# Altium PCB CurrentSens.PcbDoc
Units mil, origin at the board's own origin, x right, y up, seen from the top; angles counter-clockwise.
Board outline 2425 x 1984 mil, 2 copper layers (Top Layer, Bottom Layer); 37 components, 22 nets, 90 pads, 18 vias.
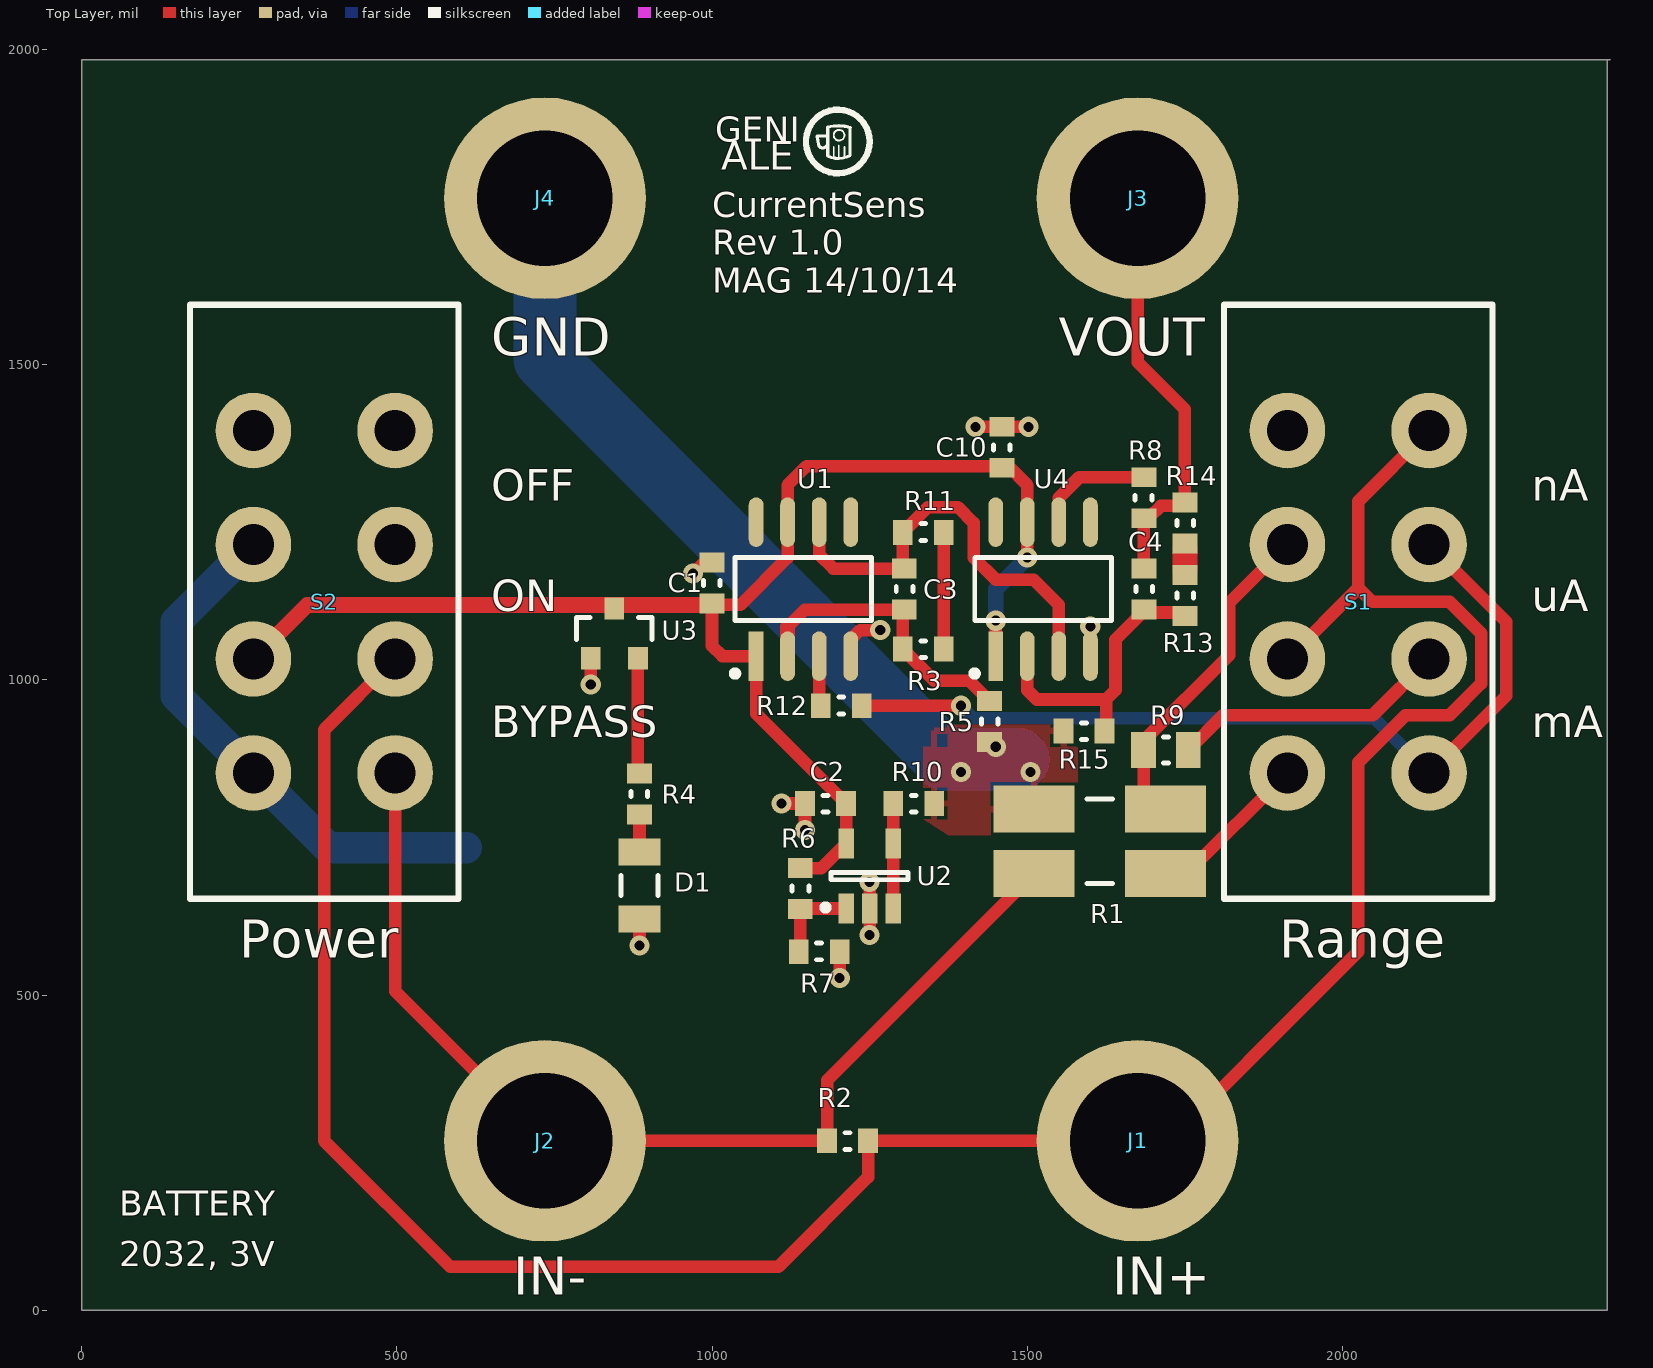
[diagram p0: Top Layer view]
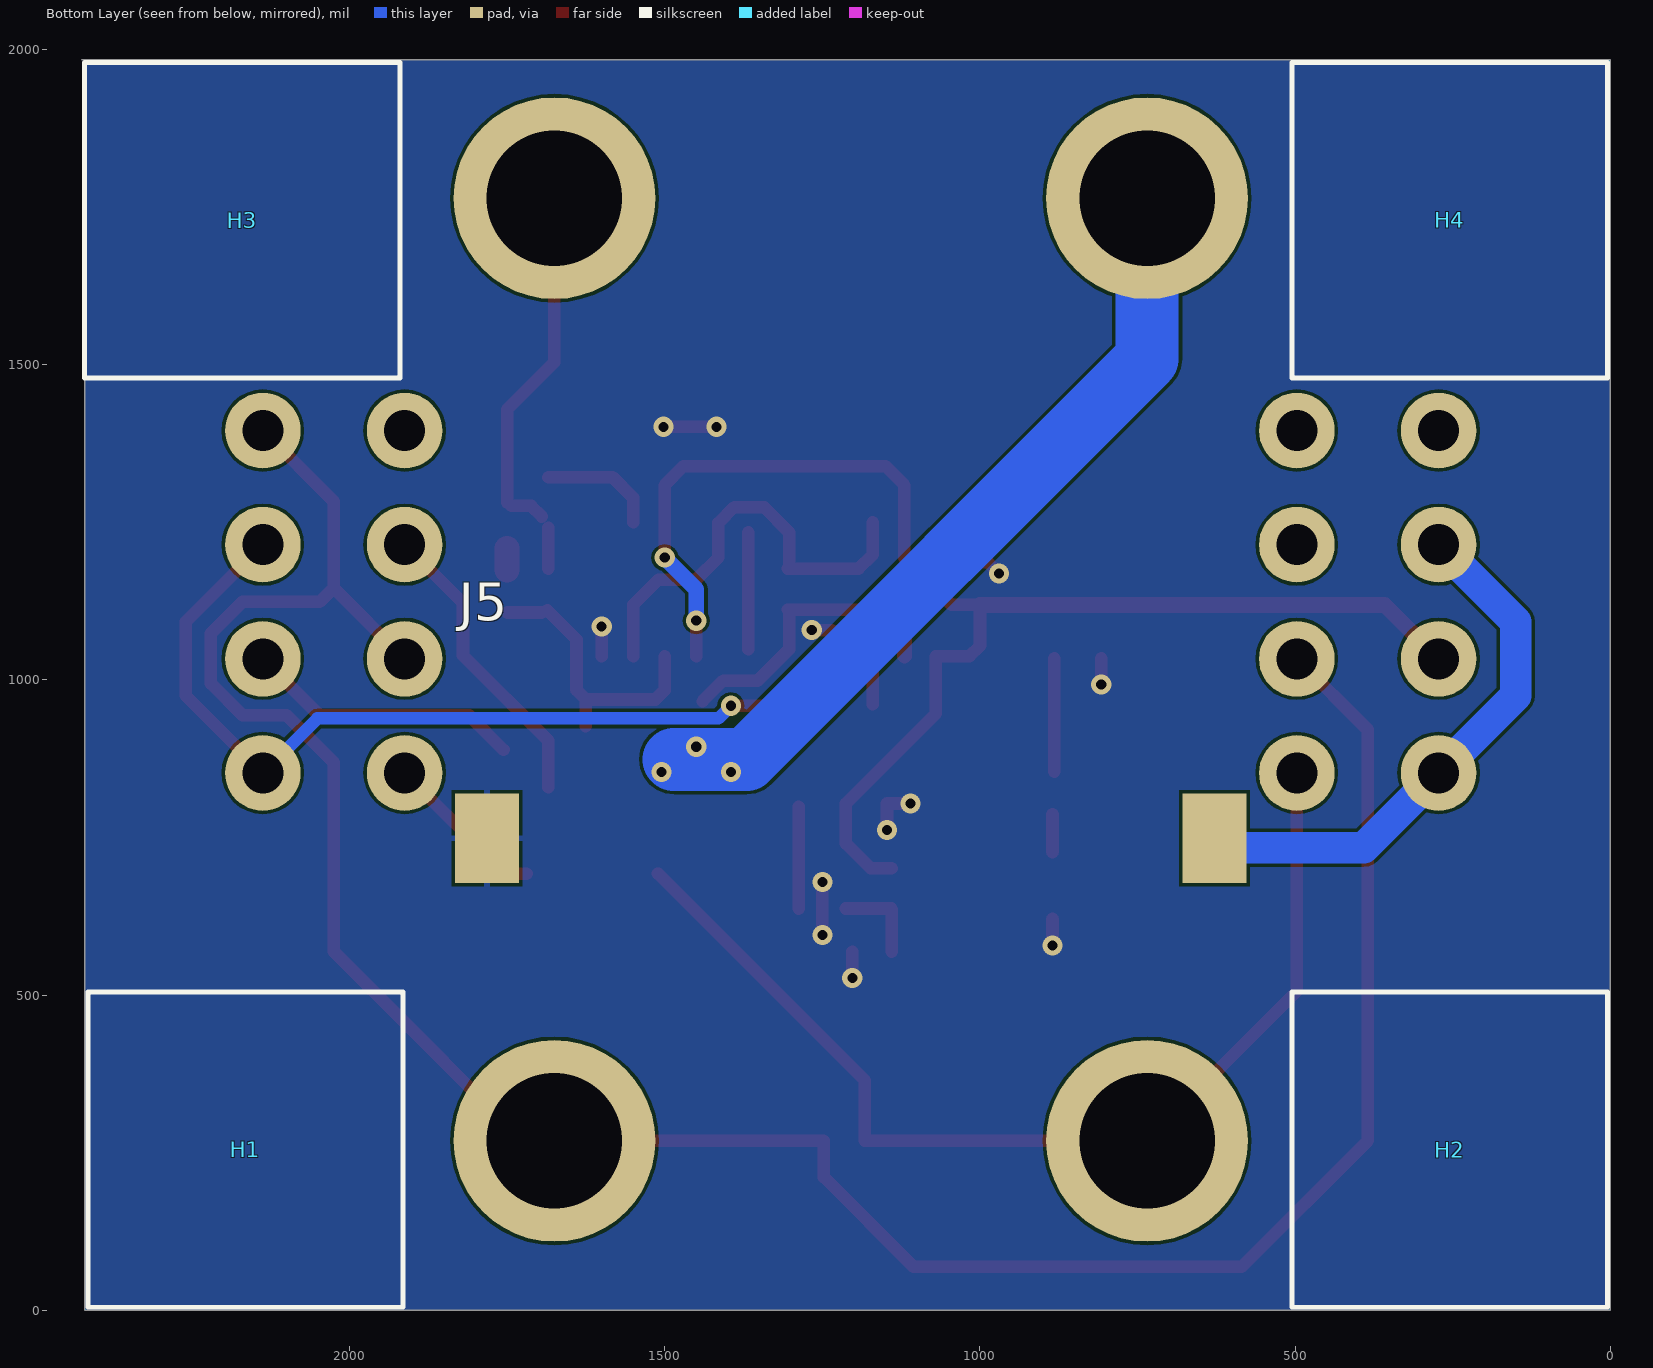
[diagram p1: Bottom Layer view, seen from below]

## Layer stack, top to bottom
Top Layer: signal copper 1.4
Dielectric: dielectric 12.6, FR-4, Dk 4.8
Bottom Layer: signal copper 1.4

## Board outline
0,0 0,1984 2425,1984 2420,1984 2420,0

## Design rules (kind name [scope] priority, off if disabled: settings)
Clearance Clearance~MyroPCBStandard [All] p1: gap=5 // Sunstone Circuits Minimum Clearance Rule (MLB~4&6 Layer Designs)
Height [All] p1: minheight=0 maxheight=600 prefheight=78.74
HoleSize HoleSize~MyroPCBStandard [All] p1: absolutevalues=TRUE maxlimit=251 minlimit=15.75 maxpercent=80.000 minpercent=20.000 // Sunstone Circuits Hole Size Rule (MLB~4&6 Layer Designs)
HoleSize Testpoint [All] p2: absolutevalues=TRUE maxlimit=100 minlimit=1 maxpercent=80.000 minpercent=20.000
HoleSize TestPointUsage [All] p3: absolutevalues=TRUE maxlimit=100 minlimit=1 maxpercent=80.000 minpercent=20.000
MinimumAnnularRing "MinimumAnnularRing~Sunstone Circuits" [All] p1: minimumring=5 // Sunstone Circuits Minimum Annular Ring (MLB~4&6 Layer Designs)
MinimumSolderMaskSliver [All] p1: minsoldermaskwidth=1
PlaneClearance "PlaneClearance~Sunstone Circuits" [All] p1: clearance=12 // Sunstone Circuits Power Plane Clearance Rule (MLB~4&6 Layer Designs)
PlaneConnect [isvia] p1: planeconnectstyle=Direct reliefexpansion=20 reliefentries=4 reliefconductorwidth=10 reliefairgap=10
PlaneConnect "PlaneConnect~Sunstone Circuits" [All] p2: planeconnectstyle=Relief reliefexpansion=20 reliefentries=4 reliefconductorwidth=10 reliefairgap=10 // Sunstone Circuits Power Plane Connect Rule (MLB~4&6 Layer Designs)
PolygonConnect PolygonConnect_Via [All vs IsVia or InComponent('U1') or InComponent('L2') or InComponent('C7')] p1: connectstyle=Direct reliefconductorwidth=10 reliefentries=4 polygonreliefangle="90 Angle"
PolygonConnect "PolygonConnect~Sunstone Circuits" [All] p2: connectstyle=Relief reliefconductorwidth=10 reliefentries=4 polygonreliefangle="90 Angle" // Sunstone Circuits Polygon Connect Style (MLB~4&6 Layer Designs)
RoutingVias RoutingVias~MyroPCBStandard [All] p1: holewidth=16 width=20 viastyle="Through Hole" minholewidth=15.75 minwidth=20 maxholewidth=20 maxwidth=40 // Sunstone Circuits Routing Vias Rule (MLB~4&6 Layer Designs)
ShortCircuit ShortCircuit~MyroPCBStandard [All] p1: allowed=FALSE // Sunstone Circuits Short Circuit Rule~Do Not Allow (MLB~4&6 Layer Designs)
SilkToSilkClearance SilkToSilkClearanceOK [IsText] p1: silktosilkclearance=0
SilkToSilkClearance [All] p2: silktosilkclearance=6
SilkscreenOverComponentPads SilkToSolderMaskClearance_Exception [InComponent('R8') or InComponent('BT1') or InComponent('BT2')] p1: minsilkscreentomaskgap=0
SilkscreenOverComponentPads SilkToSolderMaskClearance [IsPad] p2: minsilkscreentomaskgap=6
SolderMaskExpansion "SolderMaskExpansion~Sunstone Circuits" [All] p1: expansion=3 // Sunstone Circuits Solder Mask Expansion Rule (MLB~4&6 Layer Designs)
ViasUnderSMD "ViasUnderSMD~Sunstone Circuits" [All] p1: allowed=FALSE // Sunstone Circuits Vias Under SMD~Do Not Allow (MLB~4&6 Layer Designs)
Width Width~MyroPCBStandard [All] p1: maxlimit=200 minlimit=5 preferedwidth=11.81 // Sunstone Circuits Minimum Width Rule (MLB~4&6 Layer Designs)
20 further rules are at their usual default settings.

## Components (designator, comment, footprint, x,y, rotation, side; value= is the part's Value field where it differs from the comment)
B1 "2032, 3V" NO_FOOT 410,4654 r0 top
C1 "100nF, 50V" "0603 (1608 Metric)" 1000,1154 r90 top
C2 "100nF, 50V" "0603 (1608 Metric)" 1180,804 r180 top
C3 "10pF, 50V" "0603 (1608 Metric)" 1305,1144 r270 top
C4 "10pF, 50V" "0603 (1608 Metric)" 1685,1144 r270 top
C10 "100nF, 50V" "0603 (1608 Metric)" 1460,1369 r90 top
D1 "Yellow, 20mA" "1206 (3216 Metric)" 885,674 r270 top
H1 "PCB Pad" SJ-5518 2165,255 r180 bottom
H2 "PCB Pad" SJ-5518 255,255 r180 bottom
H3 "PCB Pad" SJ-5518 2170,1729 r180 bottom
H4 "PCB Pad" SJ-5518 255,1729 r180 bottom
J1 "575-4" CON_BANANA_TH_NI 1675,269 r0 top
J2 "575-4" CON_BANANA_TH_NI 735,269 r0 top
J3 "575-4" CON_BANANA_TH_NI 1675,1764 r0 top
J4 "575-4" CON_BANANA_TH_NI 735,1764 r0 top
J5 "1060" 1060 1205,749 r0 bottom
R1 "0.01R, 0.5%" "2512 (6432 METRIC)" 1615,744 r0 top
R2 "10K, 0.05%" "0603 (1608 Metric)" 1215,269 r180 top
R3 "6.8K, 0.05%" "0603 (1608 Metric)" 1335,1049 r180 top
R4 "270R, 1%" "0603 (1608 Metric)" 885,819 r90 top
R5 "1K, 0.05%" "0603 (1608 Metric)" 1440,934 r270 top
R6 "100K, 1%" "0603 (1608 Metric)" 1140,669 r270 top
R7 "100K, 1%" "0603 (1608 Metric)" 1170,569 r0 top
R8 "270R, 1%" "0603 (1608 Metric)" 1685,1289 r90 top
R9 "10R, 0.05%" "0805 (2012 Metric)" 1720,889 r0 top
R10 "270R, 1%" "0603 (1608 Metric)" 1320,804 r180 top
R11 "2.2K, 0.05%" "0603 (1608 Metric)" 1335,1234 r0 top
R12 "270R, 1%" "0603 (1608 Metric)" 1205,959 r0 top
R13 "6.8K, 0.05%" "0603 (1608 Metric)" 1750,1134 r270 top
R14 "2.2K, 0.05%" "0603 (1608 Metric)" 1750,1249 r270 top
R15 "1K, 0.05%" "0603 (1608 Metric)" 1590,919 r180 top
S1 "DP3T" L203-MS 2025,1124 r0 top
S2 "DP3T" L203-MS 385,1124 r0 top
U1 "MAX4239" SOIC8_154MIL 1145,1144 r0 top
U2 "LMV321AS5X" SOT23-5 1250,689 r90 top
U3 "TPS3809" SOT23-3 845,1074 r0 top
U4 "MAX4239" SOIC8_154MIL 1525,1144 r0 top

## Footprints (in the part's own frame and the unit in brackets; to place one, negate y for a bottom-side part, rotate by r counter-clockwise, add the part's x,y. Pads: shape width x height; smd on the part's side, far side on the other; paste and mask are expansions set on the pad)
"0603 (1608 Metric)" [mm] "0.063\" L x 0.031\" W (1.60mm x 0.80mm)"
  rect 0.8x1 smd: 1(-0.826,0) 2(0.826,0)
  silkscreen extent -0.1,-0.33 0.1,0.35, body extent -0.84,-0.43 0.86,0.43, height 0.9
"0805 (2012 Metric)" [mm] "0.079\" L x 0.049\" W (2.00mm x 1.25mm)"
  rect 1x1.45 smd: 1(-0.9,0) 2(0.9,0)
  silkscreen extent -0.1,-0.53 0.1,0.53, body extent -1.03,-0.64 1,0.63, height 0.65
1060 [mil]
  rect 102x142 smd: 1(-577,0) 2(577,0)
  body extent -628,-315 625,315, height 220
"1206 (3216 Metric)" [mm] "Chip Passive, Body 3.2x1.6mm, IPC High Density"
  rect 1.1x1.7 smd: 1(-1.35,0) 2(1.35,0)
  silkscreen extent -0.4,-0.75 0.4,0.75, body extent -1.7,-0.9 1.7,0.9, height 1.3
"2512 (6432 METRIC)" [mm] "(6.4mm x 3.2mm)"
  rect 3.25x1.9 smd: 1(-2.65,-1.3) 2(2.65,-1.3) 3(-2.65,1.3) 4(2.65,1.3)
  silkscreen extent -0.51,-1.7 0.51,1.7, body extent -3.2,-1.7 3.3,1.7, height 5
CON_BANANA_TH_NI [mil] "Connector, banana,Through Hole, non-insulated"
  round 320 hole 215: 1(0,0)
  body extent -155,-156 156,156, height 93
L203-MS [mil]
  round 120 hole 65: 1(-112.5,-271.5) 2(-112.5,-90.5) 3(-112.5,90.5) 4(-112.5,271.5) 5(112.5,-271.5) 6(112.5,-90.5) 7(112.5,90.5) 8(112.5,271.5)
  silkscreen extent -213,-471 213,471, body extent -213,-471 213,471, height 558
NO_FOOT [mil] "No Footprint - Reserved for off-board components"
SJ-5518 [mil] "BUMPER SQUARE 0.5\"L X 0.5\"W BLK"
  silkscreen extent -250,-250 250,250, body extent -250,-250 250,250, height 230
SOIC8_154MIL [mm] "8-Pin Plastic Medium Body Small Outline Package 1.27 mm Pitch, IPC Medium Density"
  rect 0.6x2 smd: 1(-1.905,-2.7)
  oval 0.6x2 smd: 2(-0.635,-2.7) 3(0.635,-2.7) 4(1.905,-2.7) 5(1.905,2.7) 6(0.635,2.7) 7(-0.635,2.7) 8(-1.905,2.7)
  silkscreen extent -2.88,-3.52 2.75,1.27, body extent -2.75,-1.91 2.75,1.91, height 2.04
SOT23-3 [mm] "SOT-23; 3 Leads; Body 3.0 x 2.5 mm, inc. leads (LxW max)"
  rect 0.8x0.9 smd: 1(-0.95,-1) 2(0.95,-1) 3(0,1)
  silkscreen extent -1.52,-0.25 1.52,0.64, body extent -1.5,-0.65 1.5,0.65, height 1
SOT23-5 [mm] "SOT23, 5-Leads, Body 2.9x1.7mm, Pitch 0.95mm, Lead Span 2.8mm, IPC Low Density"
  rect 1.22x0.62 smd: 1(-1.31,0.95) 2(-1.31,0) 3(-1.31,-0.95) 4(1.31,-0.95) 5(1.31,0.95)
  silkscreen extent -1.39,-1.55 0.15,1.9, body extent -0.9,-1.55 0.9,1.55, height 0.9

## Part data
B1: library part CR2032, "BATTERY LITHIUM COIN 3V 20MM"
C1 C2 C10: library part CL10B104KB8SFNC, "CAP CER 100NF 50V 10% X7R 0603"
C3 C4: library part CL10C100JB8NCNC, "CAP CER 10PF 50V 5% NP0 0603"
D1: library part APTR3216SYCK, "LED 3.2X1.6MM 590NM YLW CLR SMD"
H1 H2 H3 H4: library part "SJ-5518 (BLACK)", "BUMPER SQUARE 0.5\"L X 0.5\"W BLK"
J1 J2 J3 J4: "JACK NON-INSULATED .218\""
J5: "HOLDER BATT COIN 2032 20MM SMD"
R1: library part LVK24R010DER, "RES 0.01 OHM 1W 0.5% 2412"
R2: library part RG1608N-103-W-T1, "RES 10.0K OHM 1/10W .05% 0603SMD"
R3 R13: library part RG1608N-682-W-T1, "RES 6.8K OHM 1/10W .05% 0603 SMD"
R4 R8 R10 R12: library part RMCF0805FT270R, "RES 270 OHM 1/8W 1% 0805"
R5 R15: library part RG1608N-102-W-T1, "RES 1K OHM 1/10W .05% 0603 SMD"
R6 R7: library part MCT06030C1003FP500, "RES 100K OHM 1/8W 1% SMD 0603"
R9: library part RNCF0805AKT10R0, "RES 10 OHM 1/10W 0.05% 0805"
R11 R14: library part RG1608N-222-W-T1, "RES 2.2K OHM 1/10W .05% 0603 SMD"
S1 S2: library part L203011MS02Q, "SWITCH SLIDE DP3T 4A PC 125V"
U1 U4: library part MAX4239ASA+-ND, "IC OPAMP GP 6.5MHZ RRO 8SOIC"
U2: "IC OPAMP VFB 1.4MHZ RRO SOT23-5"
U3: library part TPS3809L30DBVR, "IC 2.64V SUPPLY MONITOR SOT-23-3"

## Via types
v1: diameter 32, hole 16, Top Layer to Bottom Layer, tented both sides, 18 vias

## Nets (pads, with @x,y where several pads share a name; then routed paths per layer and width w, separated by ;. In a path a pad name is that pad's centre, name@x,y a point inside that pad or via, vN(x,y) a via of type N, cw(c..) or ccw(c..) an arc to the next point about the centre after c; other vN are vias at no path point)
+VBAT: J5.1 S2.1 S2.3 | length 850.1
  Bottom Layer w50: S2.3 150,1092 150,975 391,734 J5.1@610,734
+VCC: C1.1 C2.1 C10.1 R6.1 S2.2 U1.1 U1.7 U2.5 U3.3 U4.1 U4.7 | length 2309.9
  Top Layer w20: C1.1 C1.1@1000,1119 ; R6.1 1173.52,701.5 U2.5 C2.1@1212.6,798.9 ; C2.1 1070,946.5 U1.1 1016.3,1037.7 1000,1054 C1.1@1000,1119 ; U4.1 v1(1450,1094) ; v1(1500,1194) U4.7 1500,1309 1470,1339 1150,1339 1120,1309 U1.7 1120,1194 1045,1119 C1.1@1000,1119
  Top Layer w25: S2.2 358,1119 C1.1@1000,1119
  Bottom Layer w25: v1(1450,1094) 1450,1144 v1(1500,1194)
GND: C1.2 C2.2 C10.2 D1.2 J5.2 R7.2 U1.4 U2.2 U3.1 U4.4 | length 558.8
  Top Layer w20: v1@807.6,987.78 v1(807.6,992.78) U3.1 ; v1@885,574 v1(885,579) D1.2 ; v1(970,1169) 987.5,1186.5 C1.2 ; v1@1105.65,804 C2.2 v1(1147.5,762.15) v1@1147.5,757.15 ; v1@1202.5,522.15 v1(1202.5,527.15) R7.2 ; U1.4@1220,1064 1235,1079 v1(1266.85,1079) v1@1271.85,1079 ; v1@1250,590.57 v1(1250,595.57) U2.2 v1(1250,679.28) v1@1250,684.28 ; v1@1413.15,1401.5 v1(1418.15,1401.5) C10.2 v1(1501.85,1401.5) v1@1506.85,1401.5 ; U4.4 v1(1600,1084.55)
  other v1: 1110,804
IN+: J1.1 R2.1 S1.2 S1.8 S2.6 | length 4102.2
  Top Layer w20: S2.6 385,921 385,269 585,69 1105,69 1247.5,211.5 R2.1 J1.1 ; J1.1@1675,219 2025,569 2025,869 2100,944 2170,944 2220,994 2220,1074 2170,1124 2047,1124 2025,1146 ; S1.2 2025,1146 ; S1.8 2025,1283 2025,1146
IN-: J2.1 R1.1 R2.2 S2.5 | length 1689.1
  Top Layer w20: S2.5 497.5,506.5 J2.1 R2.2 1182.5,364.65 R1.1
NetC3_1: C3.1 R11.1 U1.6 U4.3 | length 692.4
  Top Layer w20: U1.6 1170,1199 1192.5,1176.5 C3.1 ; C3.1@1302.5,1179 R11.1 1342.5,1274 1390,1274 1415,1249 1415,1194 1450,1159 1510,1159 1550,1119 U4.3
NetC3_2: C3.2 R3.2 R5.1 U1.2 | length 474.4
  Top Layer w20: 1120,1084 1147.5,1111.5 C3.2 ; C3.2@1302.5,1109 R3.2 1352.5,999 1407.5,999 R5.1
  Top Layer w23.62: U1.2 1120,1084
NetC4_2: C4.2 R13.2 R15.1 U4.2 | length 449
  Top Layer w20: U4.2 1500,984 1515,969 1625,969 ; R15.1@1625,926.5 1625,969 ; C4.2@1686.25,1110.25 1640,1064 1640,984 1625,969 ; C4.2@1695,1107 R13.2@1750,1107
NetD1_1: D1.1 R4.1 | length 59.4
  Top Layer w20: D1.1 R4.1
NetR1_2: R1.2 S1.1 | length 259.3
  Top Layer w20: R1.2 1752.82,692.82 S1.1
NetR1_4: R1.4 R9.1 S1.3 | length 479
  Top Layer w20: R1.4@1684.57,829.94 R9.1 1684.57,903.57 1820,1039 1820,1122 S1.3
NetR3_1: R3.1 R11.2 | length 185
  Top Layer w20: R3.1 R11.2
NetR4_2: R4.2 U3.2 | length 180.5
  Top Layer w20: R4.2@882.4,854.1 U3.2
NetR6_2: R6.2 R7.1 U2.1 | length 139.2
  Top Layer w20: R7.1@1140,569 R6.2 ; R6.2@1140.93,637.43 U2.1
NetR8_2: R8.2 U4.6 | length 187.2
  Top Layer w20: U4.6 1550,1289 1582.5,1321.5 R8.2
NetR9_2: R9.2 S1.6 | length 441.9
  Top Layer w20: R9.2 1810.43,944 2048,944 S1.6
NetR10_2: R10.2 U2.3 U2.4 | length 161.7
  Top Layer w20: U2.3 U2.4 R10.2@1287.4,799.1
NetR12_1: R12.1 U1.3 | length 76.2
  Top Layer w20: R12.1@1170,961.5 U1.3
NetR12_2: R12.2 S1.5 S1.7 | length 1407.6
  Top Layer w20: R12.2 v1(1395,959) ; S1.5 2260,975 2260,1092 S1.7
  Bottom Layer w20: v1(1395,959) 1415,939 2051,939 S1.5
NetR13_1: R13.1 R14.2 | length 35
  Top Layer w39.37: R13.1@1750,1174 R14.2@1750,1209
VGND: J4.1 R1.3 R5.2 R10.1 R15.2 | length 1268
  Bottom Layer w100: J4.1 735,1509 1370,874 1485,874
  other v1: 1395,854 1505,854 1450,894
VOUT: C4.1 J3.1 R8.1 R14.1 | length 634.1
  Top Layer w20: J3.1 1675,1504 1750,1429 R14.1 ; C4.1 R8.1@1685,1241.5 ; R8.1@1695,1259 1712,1276 R14.1@1743.5,1276
pads on no net: S1.4 S2.4 S2.7 S2.8 U1.5 U1.8 U4.5 U4.8

## Polygon pours and split planes (outlines as drawn)
VGND on Top Layer "VGND" (solid, remove dead copper, pour order 2): 1335,929 1570,929 1580,920.25 1580,754 1375,754 1335,779
GND on Bottom Layer "GND" (solid, remove dead copper, pour order 4): 0,0 0,1984 2420,1984 2420,0

## Silkscreen, mask and mechanical layers (free items; w line width, h text height)
Top Overlay:
  circle w10: c1199.49,1854 r50.51
  circle w3: c1201.51,1864 r8.51
  lines w3: 1193,1829 1193,1845 ; 1201,1828 1201,1848 ; 1210,1828 1210,1845
  lines w5: 1167,1862 ccw(c1237.43,1867.51) 1169.98,1846.51 ccw(c1175.44,1850.72) 1181.17,1846.88 ; 1167,1863 1182,1863 ; 1183.51,1830.92 1183.51,1877.01 cw(c1200.26,1808.37) 1219.39,1876.38 ; 1183.8,1830.92 ccw(c1200.39,1864.27) 1219,1832 ; 1219,1875 1219.11,1832
  text "GENI" at 1005,1854 h40
  text "ALE" at 1015,1809 h45
  text "CurrentSens" at 1000,1734 h40
  text "Rev 1.0" at 1000,1674 h40
  text "MAG 14/10/14" at 1000,1614 h40
  text "GND" at 650,1514 h60
  text "VOUT" at 1550,1514 h60
  text "OFF" at 650,1284 h50
  text "nA" at 2300,1284 h50
  text "ON" at 650,1109 h50
  text "uA" at 2300,1109 h50
  text "BYPASS" at 650,909 h50
  text "mA" at 2300,909 h50
  text "Power" at 250,559 h60
  text "Range" at 1900,559 h60
  text "BATTERY" at 60,150 h40
  text "2032, 3V" at 60,70 h40
  text "IN-" at 685,25 h60
  text "IN+" at 1635,25 h60
Mechanical 1:
  the board outline again, w5